# Altium PCB AVRDevBoard.PcbDoc (part 1 of 3)
Units mm, origin at the board's own origin, x right, y up, seen from the top; angles counter-clockwise.
Board outline 84.2 x 55.88 mm, 2 copper layers (Top Layer, Bottom Layer); 37 components, 46 nets, 157 pads, 38 vias.
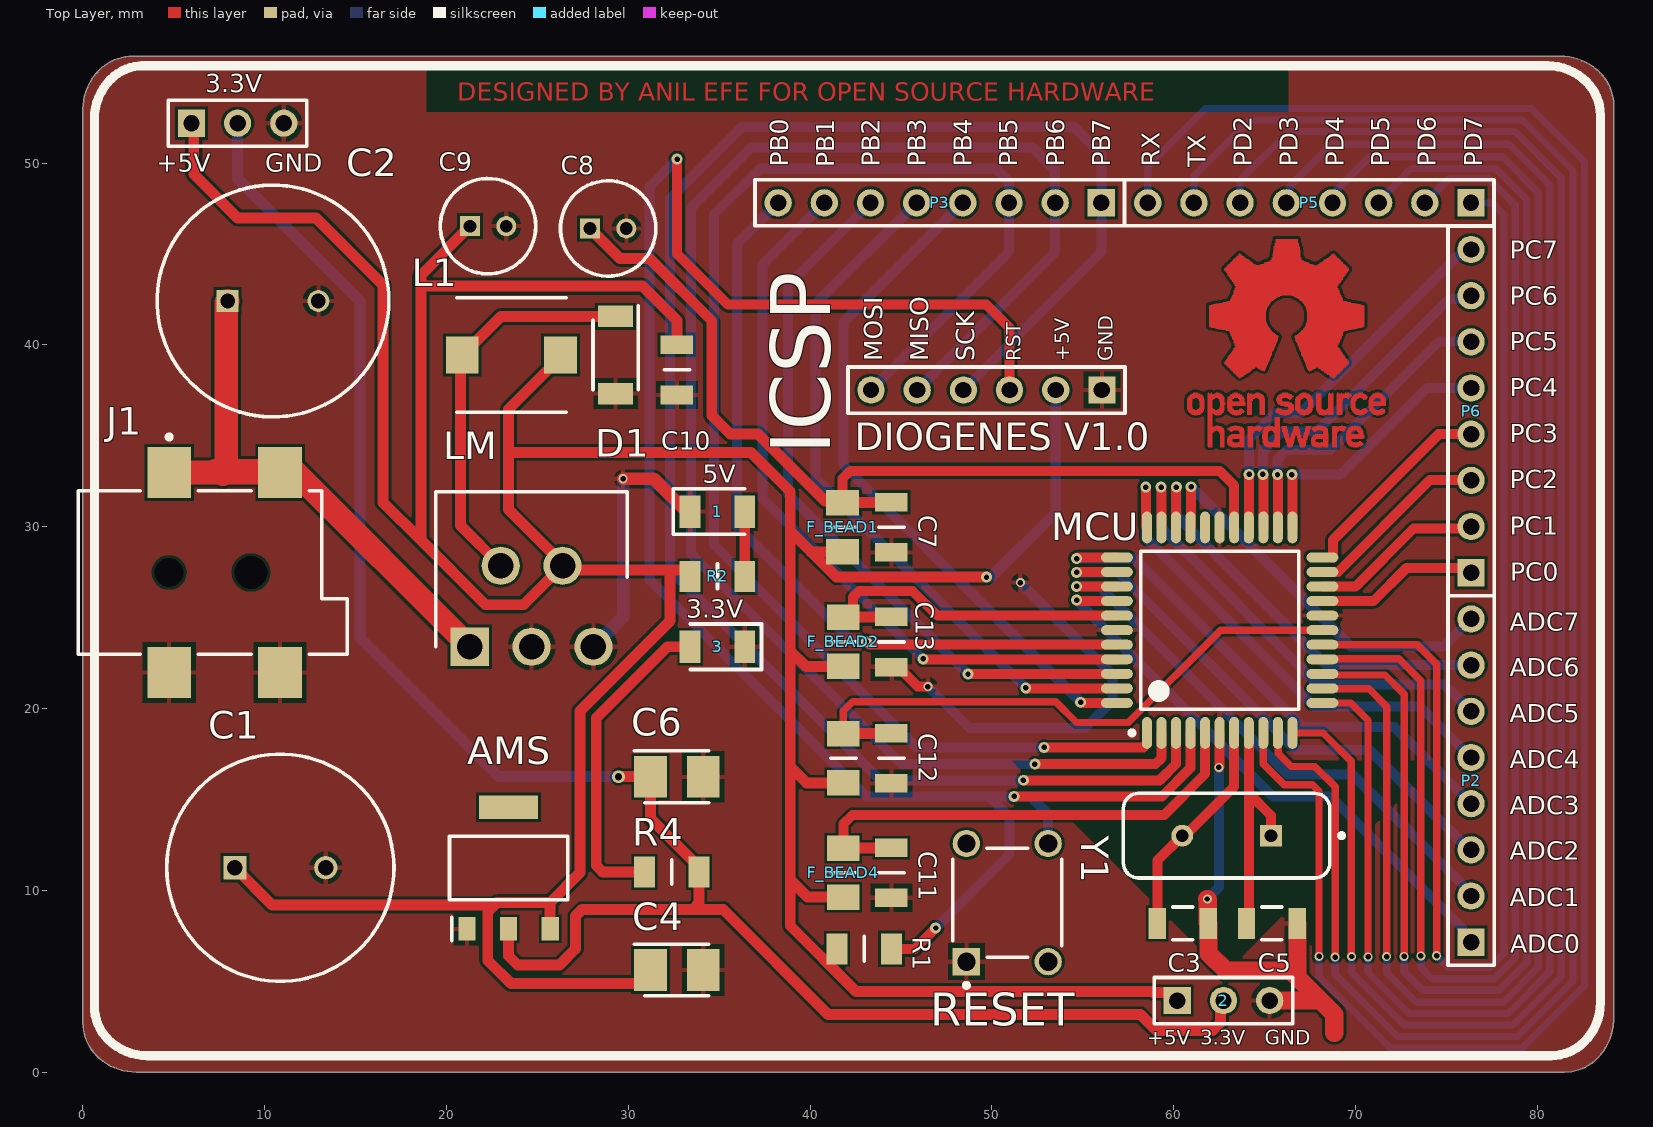
[diagram p0: Top Layer view]
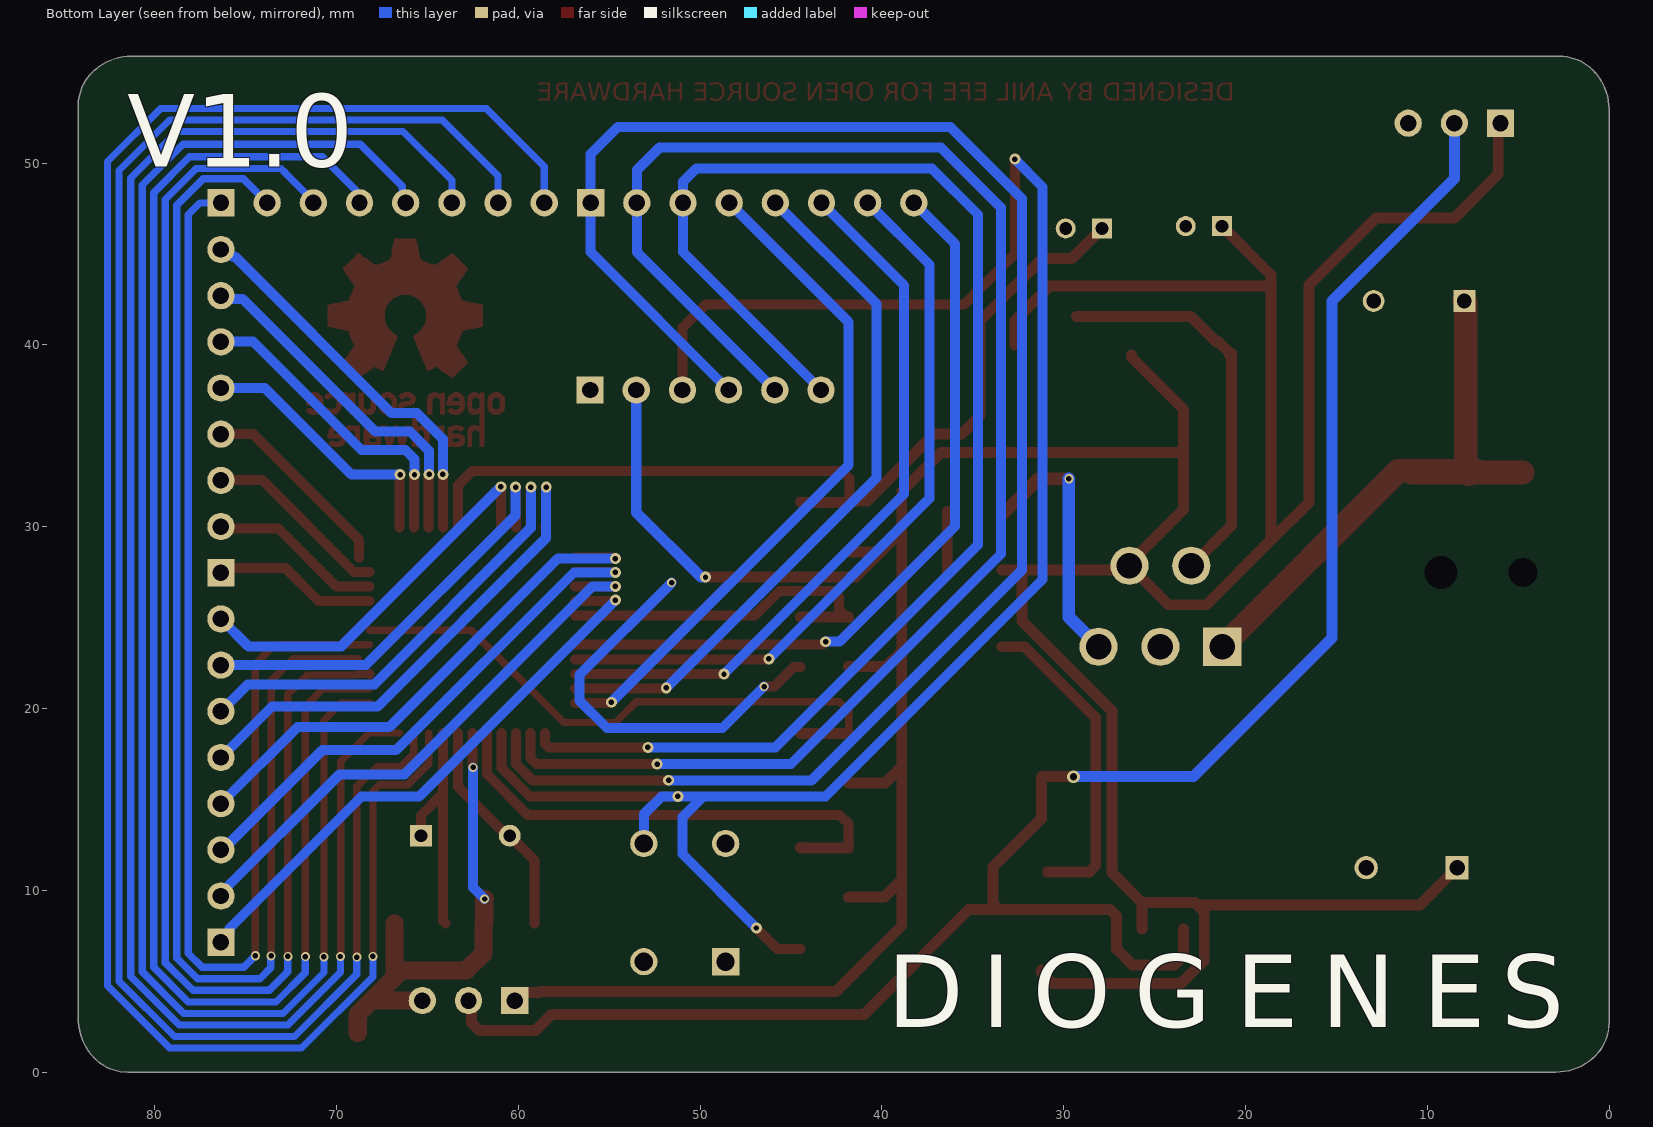
[diagram p1: Bottom Layer view, seen from below]
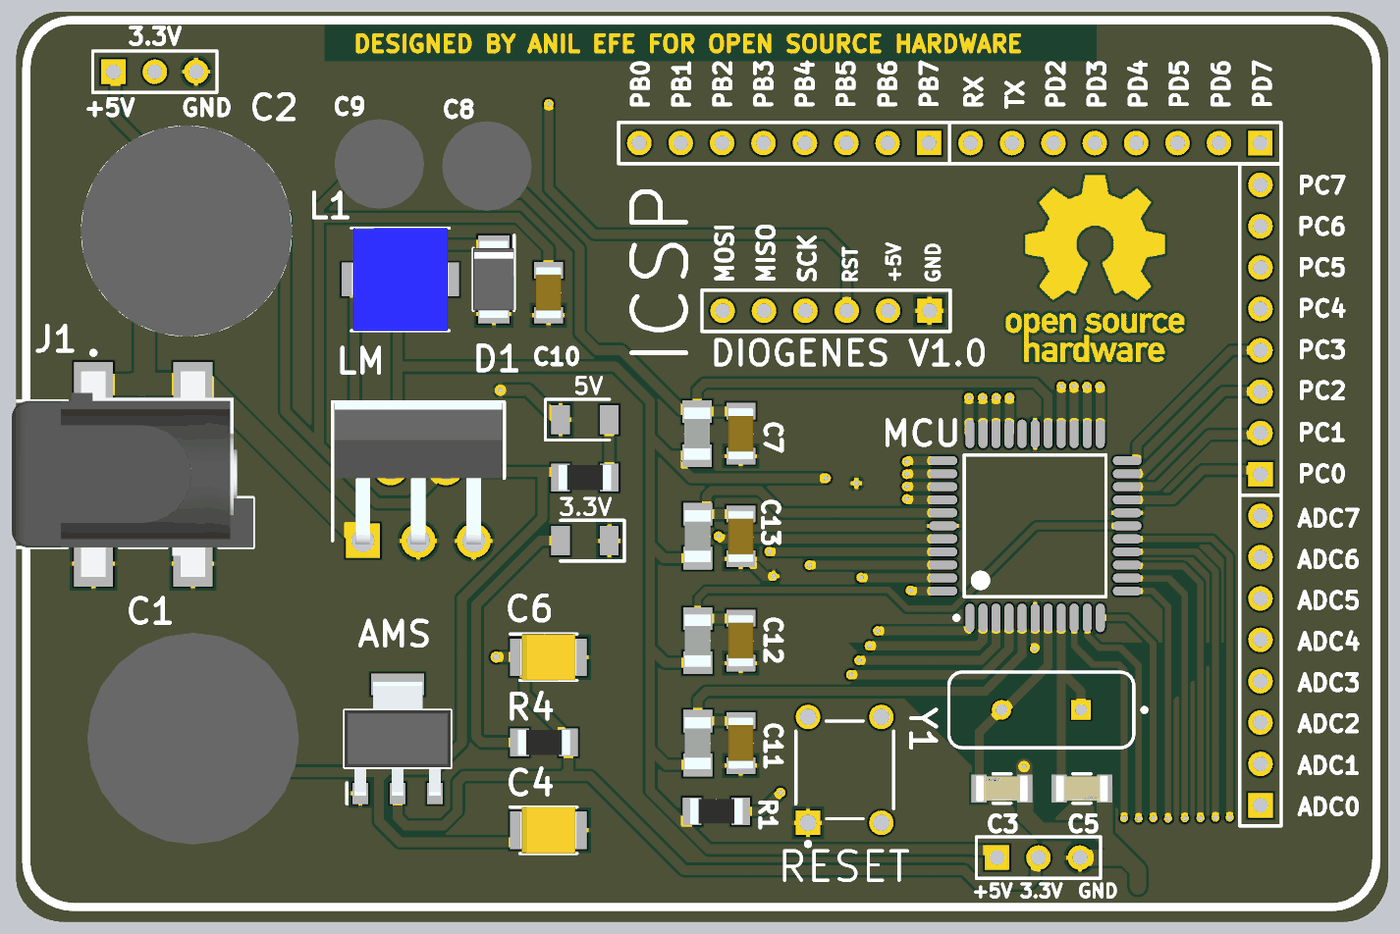
[diagram p4: 3D render of the assembled board from above, using the file's embedded part models]

## Layer stack, top to bottom
Top Solder: solder mask 0.0102, Solder Resist, Dk 3.5
Top Layer: signal copper 0.0356
Dielectric 1: dielectric 0.32, FR-4, Dk 4.8
Bottom Layer: signal copper 0.0356
Bottom Solder: solder mask 0.0102, Solder Resist, Dk 3.5

## Board outline
0,2.716 0,52.959 cw(c3.066,52.959) 0.898,55.127 cw(c2.716,53.309) 2.716,55.88 81.28,55.88 cw(c81.28,52.814) 83.448,54.982 cw(c81.63,53.164) 84.201,53.164 84.201,3.048 84.198,3.048 cw(c81.135,2.921) 83.303,0.753 cw(c81.485,2.571) 81.485,0 2.921,0 cw(c2.921,3.066) 0.753,0.898 cw(c2.571,2.716)

## Design rules (kind name [scope] priority, off if disabled: settings)
Clearance [All] p1: gap=0.15 ignorepadtopadclearanceinfootprint=FALSE
ComponentClearance [All] p1: gap=0 collisioncheckmode=3 verticalgap=0 showdistances=FALSE
PolygonConnect [All] p1: connectstyle=Relief reliefconductorwidth=0.254 reliefentries=4 polygonreliefangle="90 Angle" airgapwidth=0.254
RoutingVias [All] p1: holewidth=0.711 width=1.27 viastyle="Through Hole" minholewidth=0.711 minwidth=1.27 maxholewidth=0.711 maxwidth=1.27
SolderMaskExpansion [All] p1: expansion=0.102 istentingtop=FALSE
Width [All] p1: maxlimit=5 minlimit=0.254 preferedwidth=0.254 minimp=50.000000 maximp=50.000000 favimp=50.000000
29 further rules are at their usual default settings.

## Classes and differential pairs
component class AVRDevBoard: 1 3 3.3V AMS C1 C2 C3 C4 C5 C7 C8 C9 C10 C11 C12 C13 D1 F_BEAD1 F_BEAD2 F_BEAD4 J1 L1 MCU P2 P3 P5 P6 R1 R2 R4 SW? Y1

## Components (designator, comment, footprint, x,y, rotation, side; value= is the part's Value field where it differs from the comment)
1 "LED2_1206" LEDC3216X130N 34.904,30.833 r0 top
2 "Comment" HDR1X3 60.198,3.937 r0 top
3 "LED1_1206" LEDC3216X130N 34.904,23.398 r180 top
AMS "" SOT229P700X180-4N 23.413,11.23 r90 top (schematic designator IC_AMS1)
C1 "220uF" CAPPRD500W65D1250H2200 8.358,11.245 r0 top
C2 "680uF" CAPPRD500W60D1275H2200 7.954,42.418 r0 top
C3 "22pF" FP-C1206C-EB-MFG 60.497,8.182 r0 top value="22 pF"
C4 "C?" CAPPM3528X210N 32.669,5.618 r0 top
C5 "22pF" FP-C1206C-EB-MFG 65.402,8.182 r180 top value="22 pF"
C6 "C?" CAPPM3528X210N 32.669,16.245 r0 top
C7 "100N" CAPC3216X100N 44.468,29.972 r270 top
C8 "10uF" CAPPRD200W50D525H1250 27.89,46.409 r0 top
C9 "10uF" CAPPRD200W50D525H1250 21.286,46.536 r0 top
C10 "100N" CAPC3216X100N 32.669,38.627 r270 top
C11 "100N" CAPC3216X100N 44.468,10.972 r270 top
C12 "100N" CAPC3216X100N 44.468,17.262 r270 top
C13 "100N" CAPC3216X100N 44.468,23.66 r270 top
D1 "" SODFL4725X110N 29.306,39.447 r270 top
F_BEAD1 "" BEADC3216X180N 41.783,29.972 r90 top
F_BEAD2 "" BEADC3216X180N 41.828,23.676 r90 top
F_BEAD3 "" BEADC3216X180N 41.828,17.262 r90 top
F_BEAD4 "" BEADC3216X180N 41.828,10.972 r90 top
J1 "PJ-002AH-SMT-TR" CUI-PJ-002AH-4_V 7.144,27.486 r0 top
L1 "33uH" INDPM6063X300N 23.57,39.447 r180 top
LM "" TO170P470X1028X2142-5P 21.281,23.398 r0 top (schematic designator IC_LM1)
MCU "ATmega32-16AU" 44A_N 62.529,24.311 r90 top (schematic designator U1)
P1 "ICSP" HDR1X6 56.052,37.519 r180 top
P2 "PORTA_ADC" HDR1X8 76.358,7.15 r90 top
P3 "PORTB" HDR1X8 56.021,47.821 r180 top
P5 "PORTD" HDR1X8 76.353,47.818 r180 top
P6 "PORTC" HDR1X8 76.358,27.47 r90 top
R1 "10K" RESC3216X70N 42.971,6.785 r180 top
R2 "220R" RESC3216X70N 34.904,27.273 r0 top (schematic designator 2)
R4 "120R" RESC3216X70N 32.394,11.01 r0 top (schematic designator 4)
Y1 "16MHZ" FOX-FOXSLF160-20 62.91,13.008 r180 top
? "Comment" HDR1X3 5.969,52.197 r0 top
? "Comment" ITT-PTS645S-4_V 50.845,9.325 r90 top

## Footprints (in the part's own frame and the unit in brackets; to place one, negate y for a bottom-side part, rotate by r counter-clockwise, add the part's x,y. Pads: shape width x height; smd on the part's side, far side on the other; paste and mask are expansions set on the pad)
44A_N [mm] "Thin QFP, 44-Leads, Body 10x10mm, Pitch 0.8mm, IPC Medium Density"
  oval 1.75x0.55 smd: 1(-5.65,4) 2(-5.65,3.2) 3(-5.65,2.4) 4(-5.65,1.6) 5(-5.65,0.8) 6(-5.65,0) 7(-5.65,-0.8) 8(-5.65,-1.6) 9(-5.65,-2.4) 10(-5.65,-3.2) 11(-5.65,-4) 23(5.65,-4) 24(5.65,-3.2) 25(5.65,-2.4) 26(5.65,-1.6) 27(5.65,-0.8) 28(5.65,0) 29(5.65,0.8) 30(5.65,1.6) 31(5.65,2.4) 32(5.65,3.2) 33(5.65,4)
  oval 0.55x1.75 smd: 12(-4,-5.65) 13(-3.2,-5.65) 14(-2.4,-5.65) 15(-1.6,-5.65) 16(-0.8,-5.65) 17(0,-5.65) 18(0.8,-5.65) 19(1.6,-5.65) 20(2.4,-5.65) 21(3.2,-5.65) 22(4,-5.65) 34(4,5.65) 35(3.2,5.65) 36(2.4,5.65) 37(1.6,5.65) 38(0.8,5.65) 39(0,5.65) 40(-0.8,5.65) 41(-1.6,5.65) 42(-2.4,5.65) 43(-3.2,5.65) 44(-4,5.65)
  silkscreen extent -5.77,-4.35 4.35,4.95, body extent -5,-5 5,5, height 1.2
BEADC3216X180N [mm]
  rect 1.4x1.8 smd: 1(-1.35,0) 2(1.35,0)
  silkscreen extent 0,-0.7 0,0.7, body extent -1.6,-0.8 1.6,0.8, height 1.8
CAPC3216X100N [mm]
  rect 1.02x1.78 smd: 1(-1.38,0) 2(1.38,0)
  silkscreen extent 0,-0.7 0,0.7, body extent -1.6,-0.8 1.6,0.8, height 1
CAPPM3528X210N [mm]
  rect 1.8x2.3 smd: 1(-1.45,0) 2(1.45,0)
  silkscreen extent -2.35,-1.43 1.75,1.43, body extent -1.75,-1.43 1.75,1.43, height 2.1
CAPPRD200W50D525H1250 [mm]
  rect 1.1x1.1 hole 0.7: 1(0,0)
  round 1.1 hole 0.7: 2(2,0)
  silkscreen extent -1.62,-2.62 3.63,2.62, body extent -1.75,-2.75 3.75,2.75, height 12.5
CAPPRD500W60D1275H2200 [mm]
  rect 1.2x1.2 hole 0.8: 1(0,0)
  round 1.2 hole 0.8: 2(5,0)
  silkscreen extent -3.87,-6.37 8.88,6.37, body extent -4,-6.5 9,6.5, height 22
CAPPRD500W65D1250H2200 [mm]
  rect 1.275x1.275 hole 0.85: 1(0,0)
  round 1.275 hole 0.85: 2(5,0)
  silkscreen extent -3.75,-6.25 8.75,6.25, body extent -4,-6.5 9,6.5, height 22
CUI-PJ-002AH-4_V [mm] "SMD, 4-Leads, Body 14.8x9 mm, Pitch 6.1mm"
  rect 2.4x2.8 smd: 1(-2.4,5.5) 1(3.7,5.5) 2(-2.4,-5.5) 3(3.7,-5.5)
  round 0 hole 1.6: MH1(-2.4,0)
  round 0 hole 1.8: MH2(2.1,0)
  silkscreen extent -7.4,-4.5 7.4,7.57, body extent -7.4,-6.3 7.4,6.3, height 11.2
FOX-FOXSLF160-20 [mm] "THD, 2-Leads, Body 11.35x4.65mm"
  rect 1.2x1.2 hole 0.7: 1(-2.44,0)
  round 1.2 hole 0.7: 2(2.44,0)
  silkscreen extent -6.45,-2.32 5.68,2.32, body extent -5.67,-2.32 5.68,2.33, height 3.6
FP-C1206C-EB-MFG [mm]
  rect 0.95x1.7 smd paste+0 mask+0: 1(-1.4,0) 2(1.4,0)
  silkscreen extent -0.55,-0.9 0.55,0.9, body extent -2,-1 2,1, height 0.25
HDR1X3 [mm] "Connector; Header; 3 Position"
  rect 1.5x1.5 hole 0.9: 1(0,0)
  round 1.5 hole 0.9: 2(2.54,0) 3(5.08,0)
  silkscreen extent -1.27,-1.27 6.35,1.27
HDR1X6 [mm] "Connector; Header; 6 Position"
  rect 1.5x1.5 hole 0.9: 1(0,0)
  round 1.5 hole 0.9: 2(2.54,0) 3(5.08,0) 4(7.62,0) 5(10.16,0) 6(12.7,0)
  silkscreen extent -1.27,-1.27 13.97,1.27
HDR1X8 [mm] "Connector; Header; 8 Position"
  rect 1.5x1.5 hole 0.9: 1(0,0)
  round 1.5 hole 0.9: 2(2.54,0) 3(5.08,0) 4(7.62,0) 5(10.16,0) 6(12.7,0) 7(15.24,0) 8(17.78,0)
  silkscreen extent -1.27,-1.27 19.05,1.27
INDPM6063X300N [mm]
  rect 1.8x2.05 smd: 1(-2.7,0) 2(2.7,0)
  silkscreen extent -3,-3.15 3,3.15, body extent -3,-3.15 3,3.15, height 3
ITT-PTS645S-4_V [mm] "TH, 4-Leads, Body 6x6mm"
  rect 1.5x1.5 hole 1: 1(-3.25,2.25)
  round 1.5 hole 1: 2(3.25,2.25) 3(-3.25,-2.25) 4(3.25,-2.25)
  silkscreen extent -4.67,-3 3,3, body extent -3,-3 3,3, height 4.4
LEDC3216X130N [mm]
  rect 1.15x1.8 smd: 1(-1.5,0) 2(1.5,0)
  silkscreen extent -2.42,-1.25 1.5,1.25
RESC3216X70N [mm]
  rect 1.15x1.7 smd: 1(-1.5,0) 2(1.5,0)
  silkscreen extent 0,-0.67 0,0.67, body extent -1.6,-0.77 1.6,0.77, height 0.7
SODFL4725X110N [mm]
  rect 1.17x1.93 smd: 1(-2.125,0) 2(2.125,0)
  silkscreen extent -2.71,-1.25 1.9,1.25, body extent -2.35,-1.25 2.35,1.25, height 1.1
SOT229P700X180-4N [mm]
  rect 1.3x0.95 smd: 1(-3.35,2.29) 2(-3.35,0) 3(-3.35,-2.29)
  rect 1.3x3.25 smd: 4(3.35,0)
  silkscreen extent -4,-3.25 1.75,3.25, body extent -3.5,-3.25 3.5,3.25, height 1.8
TO170P470X1028X2142-5P [mm]
  rect 2.1x2.1 hole 1.4: 1(0,0)
  round 2.1 hole 1.4: 2(1.7,4.46) 3(3.4,0) 4(5.1,4.46) 5(6.8,0)
  silkscreen extent -1.87,0 8.67,8.53, body extent -1.74,-0.24 8.54,8.53, height 20.67

## Part data
1 3: library part QTLP650C2TR, "LED", Manufacturer_Name=Everlight, Mouser Part Number=638-QTLP650C2, Datasheet Link=https://media.digikey.com/pdf/Data%20Sheets/Everlight%20PDFs/QTLP650(C,D)-2,3,4,7,B.pdf, Height=1.3mm, Manufacturer_Part_Number=QTLP650C2TR, Mouser Price/Stock=https://www.mouser.com/Search/Refine.aspx?Keyword=638-QTLP650C2
AMS: library part ams1117-3.3v, "Integrated Circuit", Manufacturer_Name="Advanced Monolithic Systems", Datasheet Link=http://www.advanced-monolithic.com/pdf/ds1117.pdf, Height=1.8mm, Manufacturer_Part_Number=ams1117-3.3v
C1: library part EEU-FC1J221S, "Capacitor Polarised", Manufacturer_Name=Panasonic, Mouser Part Number=667-EEU-FC1J221S, Datasheet Link=http://uk.rs-online.com/web/p/products/6283835, Height=22mm, Manufacturer_Part_Number=EEU-FC1J221S, Mouser Price/Stock=https://www.mouser.com/Search/Refine.aspx?Keyword=667-EEU-FC1J221S
C2: library part UPW1V681MHD, "Capacitor Polarised", Manufacturer_Name=Nichicon, Mouser Part Number=647-UPW1V681MHD, RS Part Number=7152776P, Allied Price/Stock=https://www.alliedelec.com/nichicon-upw1v681mhd/70187400/, Allied_Number=70187400, Datasheet Link=http://nichicon-us.com/english/products/pdfs/e-upw.pdf, Height=22mm, Manufacturer_Part_Number=UPW1V681MHD, Mouser Price/Stock=https://www.mouser.com/Search/Refine.aspx?Keyword=647-UPW1V681MHD, RS Price/Stock=http://uk.rs-online.com/web/p/products/7152776P
C3 C5: library part CMP-03020-001476-1, "1206 22pF Ceramic Multilayer Capacitor; 50VDC; 125degC; C0G Dielec; +/-5% SMD", Capacitance="22 pF", Manufacturer=KEMET, Manufacturer Part Number=C1206C220J5GACTU, Package=C1206C-EB, Temperature="-55°C to +150°C", Temperature Characteristic=C0G, Temperature Coefficient=15%, Temperature Range High=+150°C, Temperature Range Low=-55°C, Tolerance=0.05, Voltage Rating="50 V", Automotive=Yes, Automotive Grade="Grade 0", Category=Cap, ComponentLink2Description=Datasheet, ComponentLink2URL=https://content.kemet.com/datasheets/KEM_C1007_X8R_ULTRA_150C_SMD.pdf, Device Class L1="Passive Components", Device Class L2=Capacitors, Device Class L3="Ceramic Capacitors", Digikey Description="1206 22pF Ceramic Multilayer Capacitor; 50VDC; 125degC; C0G Dielec; +/-5% SMD", Height=0.88mm, Lead Free=Yes, Material=Ceramic, Mouser Description="1206 22pF Ceramic Multilayer Capacitor; 50VDC; 125degC; C0G Dielec; +/-5% SMD", Octopart=https://octopart.com/c1206c220j5gactu-kemet-131912, RoHS=TRUE, Ipc Land Pattern Name=CAPC320160X78
C4 C6: library part TAJB106M025RNJ, "Capacitor Polarised", Manufacturer_Name=AVX, Mouser Part Number=581-TAJB106M025RNJ, Datasheet Link=http://datasheets.avx.com/TAJ.pdf, Height=2.1mm, Manufacturer_Part_Number=TAJB106M025RNJ, Mouser Price/Stock=https://www.mouser.com/Search/Refine.aspx?Keyword=581-TAJB106M025RNJ
C7 C10 C11 C12 C13: library part CL31B104KBCNNNC, "Capacitor", Manufacturer_Name="Samsung Electro-Mechanics", RS Part Number=7666947, Datasheet Link=http://www.samsungsem.com/kr/support/product-search/mlcc/CL31B104KBCNNNC.jsp, Height=1mm, Manufacturer_Part_Number=CL31B104KBCNNNC, RS Price/Stock=http://uk.rs-online.com/web/p/products/7666947
C8 C9: library part UHE1H100MDD1TD, "Capacitor Polarised", Manufacturer_Name=Nichicon, Mouser Part Number=647-UHE1H100MDD1TD, Datasheet Link=http://nichicon-us.com/english/products/pdfs/e-uhe.pdf, Height=12.5mm, Manufacturer_Part_Number=UHE1H100MDD1TD, Mouser Price/Stock=https://www.mouser.com/Search/Refine.aspx?Keyword=647-UHE1H100MDD1TD
D1: library part VSS8D5M10-M3_H, "Schottky Diode", Manufacturer_Name=Vishay, Manufacturer_Part_Number=VSS8D5M10-M3/H, Mouser Part Number=78-VSS8D5M10-M3/H, Datasheet Link=https://componentsearchengine.com/Datasheets/1/VSS8D5M10-M3_H.pdf, Height=1.1mm, Mouser Price/Stock=https://www.mouser.com/Search/Refine.aspx?Keyword=78-VSS8D5M10-M3%2FH
F_BEAD1 F_BEAD2 F_BEAD3 F_BEAD4: library part BLM31KN601BH1L, "Filter", Manufacturer_Name="Murata Electronics", Mouser Part Number=81-BLM31KN601BH1L, Datasheet Link=https://www.murata.com/en-us/products/productdetail?partno=BLM31KN601BH1%23, Height=1.8mm, Manufacturer_Part_Number=BLM31KN601BH1L, Mouser Price/Stock=https://www.mouser.com/Search/Refine.aspx?Keyword=81-BLM31KN601BH1L
J1: library part CMP-2000-06896-1, "DC Power Jack, Right Angle, -25 to 85 degC, 4-Pin 14.8 x 9 x 11 mm SMD, RoHS, Tape and Reel", Current Rating=5A, Flammability Rating=UL94V-0, Manufacturer=CUIInc., Operating Temperature Range=-25Cto+85C, Package Description="4-Pin Surface Mount Device, Body 14.8 x 9 mm, Pitch 6.1 mm", Package Reference=PJ-002AH, Voltage Rating=24V, Insulation Resistance=100MOhms, Brand=CUI, Connector Type=DCPowerJack, Contact Gender=Male, Contact Material=Brass, Contact Plating=Nickel, Datasheet URL=http://www.cui.com/product/resource/pj-002ah-smt.pdf, Datasheet Version="Rev. 1.03, 11/2012", Factory Pack Quantity=350, Housing Material=Polyamide(PA), Manufacturer URL=http://www.cui.com/, Mounting Angle=Right, Mounting Style=SMD/SMT, Mounting Technology=SurfaceMount, Outside Contact Diameter=6.5mm, Packaging=Reel, PartNumber=PJ-002AH, Product=Jacks, Product Category=DCPowerConnectors, RoHS=True, Termination Style=SMD/SMT, Inside Contact Diameter=2mm
L1: library part B82462G4333M000, "Inductor", Manufacturer_Name=EPCOS, Mouser Part Number=871-B82462G4333M, RS Part Number=4958161P, Datasheet Link=https://en.tdk.eu/inf/30/db/ind_2008/b82462g4.pdf, Height=3mm, Manufacturer_Part_Number=B82462G4333M000, Mouser Price/Stock=https://www.mouser.com/Search/Refine.aspx?Keyword=871-B82462G4333M, RS Price/Stock=http://uk.rs-online.com/web/p/products/4958161P
LM: library part LM2596T-5.0, "Integrated Circuit", Manufacturer_Name="Texas Instruments", Mouser Part Number=926-LM2596T-50, RS Part Number=3313242, Datasheet Link=http://www.ti.com/general/docs/lit/getliterature.tsp?genericPartNumber=lm2596&fileType=pdf, Height=4.7mm, Manufacturer_Part_Number=LM2596T-5.0, Mouser Price/Stock=https://www.mouser.com/Search/Refine.aspx?Keyword=926-LM2596T-50, RS Price/Stock=http://uk.rs-online.com/web/p/products/3313242
MCU: library part CMP-0095-00554-1, "8-bit AVR Microcontroller, 4.5-5.5V, 16MHz, 32KB Flash, 1024 Bytes EEPROM, 2KB SRAM, 44-pin TQFP, Industrial Grade (-40°C to 85°C)", Code_JEDEC=MS-026-ACB, ComponentLink1Description="Manufacturer URL", ComponentLink1URL=http://www.atmel.com/, ComponentLink2Description="ATmega32(L) Datasheet", ComponentLink2URL=http://atmel.com/dyn/resources/prod_documents/doc2503.pdf, ComponentLink3Description="ATmega32(L) Summary", ComponentLink3URL=http://atmel.com/dyn/resources/prod_documents/2503S.pdf, DatasheetVersion="revQ, Feb-2011", PackageDescription="44-Pin Plastic Thin Profile Quad Flat Pack, 10 x 10 x 1.0 mm Body, 0.8 mm Pitch (TQFP)", PackageReference=44A, PackageVersion="revC, Oct-2010"
P1: library part "Header 6", "Header, 6-Pin", LatestRevisionDate=17-Jul-2002, LatestRevisionNote="Re-released for DXP Platform.", Publisher="Altium Limited"
P2 P3 P5 P6: library part "Header 8", "Header, 8-Pin", LatestRevisionDate=17-Jul-2002, LatestRevisionNote="Re-released for DXP Platform.", Publisher="Altium Limited"
R1 R2 R4: library part ERJ-U08F2200V, "Resistor", Manufacturer_Name=Panasonic, Mouser Part Number=667-ERJ-U08F2200V, Datasheet Link=http://uk.rs-online.com/web/p/products/1724351, Height=0.7mm, Manufacturer_Part_Number=ERJ-U08F2200V, Mouser Price/Stock=https://www.mouser.com/Search/Refine.aspx?Keyword=667-ERJ-U08F2200V
Y1: library part CMP-1749-00003-1, "Resistance Weld Thru-Hole Crystal, 16 MHz, -20 to 70 degC, 2-Pin THD, RoHS, Bulk", Case\Package=Axial, Max Operating Temperature="155 degC", Min Operating Temperature="-55 degC", Package Quantity=200, Power Rating="250 mW", Resistance="221 kohm", Tolerance=1%, Voltage Rating="250 V", ComponentLink1Description="Manufacturer URL", ComponentLink1URL=http://www.foxonline.com/, ComponentLink2Description=Datasheet, ComponentLink2URL=http://www.foxonline.com/pdfs/hc49slf.pdf, DatasheetVersion=Mar-15, Length="0.248 inch", Mount="Through Hole", PackageDescription="2-Pin Through Hole Device, Body 11.35 x 4.65 mm", PackageReference=FOXSLF160-20, Packaging=Bulk, RoHSCompliant=true

## Via types
v1: diameter 0.6, hole 0.3, Top Layer to Bottom Layer, 24 vias
v2: diameter 0.5, hole 0.3, Top Layer to Bottom Layer, 13 vias
v3: diameter 0.7, hole 0.4, Top Layer to Bottom Layer, 1 vias

## Nets (pads, with @x,y where several pads share a name; then routed paths per layer and width w, separated by ;. In a path a pad name is that pad's centre, name@x,y a point inside that pad or via, vN(x,y) a via of type N, cw(c..) or ccw(c..) an arc to the next point about the centre after c; other vN are vias at no path point)
+3.3V: 2.2 ?.2@8.509,52.197 AMS.2 C6.1 R4.2 | length 106.2
  Top Layer w0.6: AMS.2@23.413,7.88 23.413,6.404 23.921,5.896 26.207,5.896 27.096,6.785 27.096,8.592 27.447,8.944 33.543,8.944 ; v3(29.464,16.256) 31.208,16.256 C6.1@31.219,16.245 31.219,13.96 33.894,11.285 R4.2@33.894,11.01 33.894,9.295 33.543,8.944 ; 2.2@62.738,3.937 62.566,3.765 62.566,2.719 62.133,2.286 59.055,2.286 58.166,3.175 40.993,3.175 35.224,8.944 33.543,8.944
  Bottom Layer w0.6: ?.2@8.509,52.197 8.509,49.149 15.24,42.418 15.24,23.876 22.86,16.256 v3(29.464,16.256)
+5V: 2.1 ?.1@5.969,52.197 AMS.3 C1.1 C4.1 C9.1 C10.1 F_BEAD1.1 F_BEAD2.1 F_BEAD3.1 F_BEAD4.1 L1.1 LM.4 P1.2 R1.2 R2.1 | length 249.1
  Top Layer w0.6: ?.1@5.969,52.197 6.096,52.07 6.096,49.403 8.509,46.99 12.827,46.99 16.51,43.307 16.51,31.341 18.587,29.264 ; C1.1@8.358,11.245 10.405,9.198 22.651,9.198 ; C9.1@21.286,46.536 18.587,43.837 18.587,43.234 ; AMS.3@25.703,7.88 25.703,9.329 ; L1.1@26.27,39.447 26.27,39.322 23.413,36.465 23.413,34.09 ; C4.1@31.219,5.618 31.219,5.48 30.619,4.88 23.54,4.88 22.27,6.15 22.27,8.817 22.651,9.198 ; C10.1@32.669,40.007 32.669,41.343 30.779,43.234 18.587,43.234 ; R2.1@33.404,27.631 32.303,27.631 ; F_BEAD1.1@41.783,28.622 40.057,28.622 ; F_BEAD4.1@41.828,9.622 41.808,9.642 39.859,9.642 38.907,10.595 ; F_BEAD3.1@41.828,15.912 39.813,15.912 38.907,16.818 ; F_BEAD2.1@41.828,22.31 39.765,22.31 38.907,23.168 ; v1(49.702,27.232) 41.447,27.232 40.057,28.622 ; 2.1@60.198,3.937 59.748,4.387 58.859,4.387 58.801,4.445 42.517,4.445 38.907,8.055 38.907,10.595 ; 18.587,29.264 22.143,25.708 24.231,25.708 LM.4@26.381,27.858 ; 18.587,29.264 18.587,43.234 ; 22.651,9.198 22.782,9.329 25.703,9.329 ; 23.413,34.09 23.413,30.949 26.381,27.981 LM.4@26.381,27.858 ; 23.413,34.09 36.748,34.09 38.907,31.931 38.907,29.772 ; 25.703,9.329 27.35,10.976 27.35,19.866 32.303,24.819 32.303,27.631 ; LM.4@26.381,27.858 26.608,27.631 32.303,27.631 ; 38.907,10.595 38.907,16.818 ; 38.907,16.818 38.907,23.168 ; 38.907,23.168 38.907,29.772 ; 38.907,29.772 40.057,28.622
  Bottom Layer w0.6: v1(49.702,27.232) 49.956,27.232 53.512,30.788 P1.2@53.512,37.519
AVCC: C7.1 C8.1 F_BEAD1.2 MCU.27 | length 51.5
  Top Layer w0.55: F_BEAD1.2@41.783,31.352 41.783,32.648 42.209,33.074 62.529,33.074 63.329,32.274 MCU.27@63.329,29.961
  Top Layer w0.6: C8.1@27.89,46.409 29.541,44.758 31.16,44.758 34.589,41.329 34.589,36.122 35.605,35.106 37.129,35.106 40.812,31.423 41.712,31.423 41.783,31.352 F_BEAD1.2@41.783,31.322 ; F_BEAD1.2@41.798,31.337 44.453,31.337 C7.1@44.468,31.352
DVCC1: C13.1 F_BEAD2.2 MCU.38 | length 19.3
  Top Layer w0.55: F_BEAD2.2@41.828,25.01 41.932,25.01 42.373,25.451 42.373,26.147 42.695,26.47 45.638,26.47 46.997,25.111 MCU.38@56.879,25.111
  Top Layer w0.6: F_BEAD2.2@41.828,25.01 41.843,25.025 44.453,25.025 C13.1@44.468,25.04
DVCC2: C12.1 F_BEAD3.2 MCU.17 | length 33
  Top Layer w0.4: F_BEAD3.2@41.828,18.612 41.828,19.866 42.336,20.374 53.512,20.374 54.655,19.231 57.506,19.231 62.586,24.311 MCU.17@68.179,24.311
  Top Layer w0.6: F_BEAD3.2@41.828,18.612 41.843,18.627 44.453,18.627 C12.1@44.468,18.642
DVCC3: C11.1 F_BEAD4.2 MCU.5 | length 27.3
  Top Layer w0.55: F_BEAD4.2@41.828,12.322 41.828,13.643 42.336,14.151 59.481,14.151 61.729,16.399 MCU.5@61.729,18.661
  Top Layer w0.6: F_BEAD4.2@41.828,12.322 41.843,12.337 44.453,12.337 C11.1@44.468,12.352
GND: 1.1 2.3 3.1 ?.1@48.595,6.075 ?.3@11.049,52.197 AMS.1 C1.2 C2.2 C3.2 C4.2 C5.1 C6.2 C7.2 C8.2 C9.2 C10.2 C11.2 C12.2 C13.2 D1.2 J1.2 J1.3 LM.3 LM.5 MCU.6 MCU.18 MCU.28 MCU.39 P1.1 | length 64.7
  Top Layer w0.55: C13.2@44.468,22.28 44.848,22.28 45.919,21.209 v2(46.482,21.209) ; v2(62.484,16.764) 62.529,16.809 MCU.6@62.529,18.661
  Top Layer w0.7: v2(29.718,32.639) 31.4,32.639 33.305,30.734 1.1@33.404,30.833
  Top Layer w1: v2(61.849,9.525) 61.872,9.502 61.872,8.207 C3.2@61.897,8.182 61.922,8.157 61.922,6.531 62.865,5.588 66.421,5.588 66.802,5.207 ; 2.3@65.278,3.937 68.072,3.937 ; C5.1@66.802,8.182 66.802,5.207 ; 68.834,2.159 68.834,3.175 68.072,3.937 ; 66.802,5.207 68.072,3.937
  Bottom Layer w0.55: v2(46.482,21.209) 48.768,18.923 55.118,18.923 56.642,20.447 56.642,21.844 v2(51.562,26.924) ; v2(61.849,9.525) 62.484,10.16 v2(62.484,16.764)
  Bottom Layer w0.7: LM.5@28.081,23.398 29.718,25.034 v2(29.718,32.639)
Net1_2: 1.2 R2.2 | length 3.4
  Top Layer w0.6: R2.2@36.404,27.405 1.2@36.404,30.833
Net3_2: 3.2 R4.1 | length 17.7
  Top Layer w0.6: R4.1@30.894,11.01 28.59,11.01 28.239,11.361 28.239,19.485 32.152,23.398 3.2@33.404,23.398
NetC3_1: C3.1 MCU.7 Y1.2 | length 12.3
  Top Layer w0.55: C3.1@59.097,8.182 59.097,11.635 Y1.2@60.47,13.008 60.624,13.008 63.329,15.713 MCU.7@63.329,18.661
NetC5_2: C5.2 MCU.8 Y1.1 | length 13.4
  Top Layer w0.55: C5.2@64.002,8.182 64.129,8.309 64.129,15.345 ; MCU.8@64.129,18.661 64.129,15.345 ; Y1.1@65.35,13.008 65.35,14.124 64.129,15.345
NetD1_1: D1.1 L1.2 LM.2 | length 22.1
  Top Layer w0.6: LM.2@22.981,27.858 20.773,30.066 20.773,39.544 L1.2@20.87,39.447 20.87,39.572 21.47,40.172 21.595,40.172 22.995,41.572 D1.1@29.306,41.572
NetP1_4: MCU.3 P1.4 P3.1 | length 97.2
  Top Layer w0.55: v1(51.734,16.056) 59.227,16.056 60.129,16.958 MCU.3@60.129,18.661
  Bottom Layer w0.55: P1.4@48.432,37.519 56.021,45.107 P3.1@56.021,47.821 56.021,50.504 54.528,51.997 36.24,51.997 32.303,48.06 32.303,27.613 43.86,16.056 v1(51.734,16.056)
NetP1_5: MCU.2 P1.5 P3.2 | length 88.5
  Top Layer w0.55: v1(52.369,16.945) 59.007,16.945 59.329,17.267 MCU.2@59.329,18.661 ; P3.2@53.385,47.916 P3.2@53.481,47.821
  Bottom Layer w0.55: P1.5@45.892,37.519 53.481,45.107 P3.2@53.481,47.821 53.481,49.615 52.242,50.854 36.748,50.854 33.446,47.552 33.446,28.502 45.003,16.945 v1(52.369,16.945)
NetP1_6: MCU.1 P1.6 P3.3 | length 79.6
  Top Layer w0.55: P3.3@50.845,47.916 P3.3@50.941,47.821 ; v1(52.877,17.86) 58.329,17.86 58.529,18.061 MCU.1@58.529,18.661
  Bottom Layer w0.55: P1.6@43.352,37.519 50.941,45.107 P3.3@50.941,47.821 50.941,48.98 50.21,49.711 37.256,49.711 34.716,47.171 34.716,29.01 45.865,17.86 v1(52.877,17.86)
NetP2_1: MCU.37 P2.1 | length 31.9
  Top Layer w0.55: v1(54.655,25.962) 54.668,25.962 54.719,25.911 MCU.37@56.879,25.911
  Bottom Layer w0.55: v1(54.655,25.962) 65.45,15.167 68.625,15.167 75.883,7.909 75.883,7.625 P2.1@76.358,7.15
NetP2_2: MCU.36 P2.2 | length 31.1
  Top Layer w0.55: v1(54.655,26.724) 54.668,26.724 54.681,26.711 MCU.36@56.879,26.711
  Bottom Layer w0.55: v1(54.655,26.724) 55.925,26.724 66.266,16.383 69.822,16.383 76.358,9.847 P2.2@76.358,9.69
NetP2_3: MCU.35 P2.3 | length 30.3
  Top Layer w0.55: v1(54.655,27.486) 54.668,27.486 54.693,27.511 MCU.35@56.879,27.511
  Bottom Layer w0.55: v1(54.655,27.486) 56.941,27.486 66.72,17.707 70.784,17.707 76.261,12.23 P2.3@76.358,12.23
NetP2_4: MCU.34 P2.4 | length 29.5
  Top Layer w0.55: v1(54.655,28.248) 54.668,28.248 54.731,28.311 MCU.34@56.879,28.311
  Bottom Layer w0.55: v1(54.655,28.248) 57.83,28.248 67.101,18.977 72.151,18.977 P2.4@76.358,14.77
NetP2_5: MCU.33 P2.5 | length 27.9
  Top Layer w0.55: v1(58.465,32.185) 58.465,30.025 MCU.33@58.529,29.961
  Bottom Layer w0.55: v1(58.465,32.185) 58.465,29.391 67.736,20.12 73.548,20.12 P2.5@76.358,17.31
NetP2_6: MCU.32 P2.6 | length 25.4
  Top Layer w0.55: MCU.32@59.329,29.961 v1@59.329,31.931
  Bottom Layer w0.55: v1(59.311,32.179) 59.311,29.941 67.917,21.336 74.872,21.336 P2.6@76.358,19.85
NetP2_7: MCU.31 P2.7 | length 23.3
  Top Layer w0.55: v1@60.116,32.058 60.129,32.045 MCU.31@60.129,29.961
  Bottom Layer w0.55: v1(60.146,32.179) 60.146,30.631 68.387,22.39 P2.7@76.358,22.39
NetP2_8: MCU.30 P2.8 | length 21.9
  Top Layer w0.55: MCU.30@60.929,29.961 60.955,29.986 60.951,29.99 60.961,30 v1(60.961,32.199)
  Bottom Layer w0.55: v1(60.961,32.199) 69.738,23.422 74.849,23.422 P2.8@76.358,24.93
NetP3_4: MCU.44 P3.4 | length 37.6
  Top Layer w0.55: v1(54.883,20.347) 54.897,20.347 54.933,20.311 MCU.44@56.879,20.311
  Bottom Layer w0.55: P3.4@48.401,47.821 41.828,41.248 41.828,33.402 v1(54.883,20.347)
NetP3_5: MCU.43 P3.5 | length 38.8
  Top Layer w0.55: v1@51.874,21.136 51.899,21.111 MCU.43@56.879,21.111
  Bottom Layer w0.55: P3.5@45.861,47.821 40.304,42.264 40.304,32.693 v1(51.861,21.136)
NetP3_6: MCU.42 P3.6 | length 40.1
  Top Layer w0.55: v1@48.686,21.911 MCU.42@56.879,21.911
  Bottom Layer w0.55: P3.6@43.321,47.821 38.78,43.28 38.78,31.804 v1(48.686,21.898)
NetP3_7: MCU.41 P3.7 | length 40.8
  Top Layer w0.55: v1(46.216,22.73) 46.235,22.711 MCU.41@56.879,22.711
  Bottom Layer w0.55: P3.7@40.781,47.821 37.383,44.423 37.383,31.563 v1(46.216,22.73)
NetP3_8: MCU.40 P3.8 | length 42.3
  Top Layer w0.55: v1(43.098,23.676) 43.111,23.676 43.276,23.511 MCU.40@56.879,23.511
  Bottom Layer w0.55: P3.8@38.241,47.821 35.986,45.566 35.986,30.026 42.336,23.676 v1(43.098,23.676)
NetP4_1: MCU.19 P6.1 | length 9
  Top Layer w0.55: MCU.19@68.179,25.911 70.987,25.911 72.816,27.74 76.088,27.74 P6.1@76.358,27.47
NetP4_2: MCU.20 P6.2 | length 9.5
  Top Layer w0.55: MCU.20@68.179,26.711 70.009,26.711 73.197,29.899 76.246,29.899 P6.2@76.358,30.01
NetP5_1: MCU.16 P5.1 | length 69.7
  Top Layer w0.4: MCU.16@68.179,23.511 73.39,23.511 74.467,22.434 v2(74.467,6.404)
  Bottom Layer w0.4: v2(74.467,6.404) 75.102,5.769 77.388,5.769 78.15,6.531 78.15,47.171 77.515,47.806 76.365,47.806 P5.1@76.353,47.818
NetP5_2: MCU.15 P5.2 | length 74.5
  Top Layer w0.4: MCU.15@68.804,22.733 72.39,22.733 73.593,21.53 v2(73.593,6.39)
  Bottom Layer w0.4: v2(73.593,6.39) 73.612,6.371 73.612,5.735 74.213,5.134 77.642,5.134 78.785,6.277 78.785,47.679 77.324,49.139 75.134,49.139 P5.2@73.813,47.818
NetP5_3: MCU.14 P5.3 | length 79.7
  Top Layer w0.4: MCU.14@68.179,21.911 68.208,21.882 68.914,21.882 68.952,21.844 71.628,21.844 72.679,20.793 v2(72.679,6.366)
  Top Layer w0.55: MCU.14@68.179,21.911 MCU.14@68.192,21.898
  Bottom Layer w0.4: P5.3@71.273,47.818 71.273,47.913 72.816,49.457 72.816,49.476 73.05,49.711 77.716,49.711 79.42,48.006 79.42,6.023 77.896,4.499 73.705,4.499 72.688,5.516 72.688,6.357 v2(72.679,6.366)
NetP5_4: MCU.13 P5.4 | length 84.5
  Top Layer w0.4: MCU.13@68.179,21.111 68.208,21.082 70.739,21.082 71.714,20.107 v2(71.714,6.354)
  Bottom Layer w0.4: P5.4@68.733,47.818 68.943,48.028 68.943,48.505 70.784,50.346 78.084,50.346 80.055,48.375 80.055,5.769 78.15,3.864 73.324,3.864 71.714,5.474 v2(71.714,6.354)
NetP5_5: MCU.12 P5.5 | length 89.1
  Top Layer w0.4: MCU.12@68.179,20.311 69.732,20.311 70.69,19.353 v2(70.69,6.337)
  Bottom Layer w0.4: P5.5@66.193,47.818 66.382,48.007 66.382,48.738 68.687,51.042 78.446,51.042 80.69,48.798 80.69,5.515 78.404,3.229 72.943,3.229 70.69,5.481 v2(70.69,6.337)
NetP5_6: MCU.11 P5.6 | length 94.3
  Top Layer w0.4: MCU.11@66.529,18.661 68.207,18.661 69.768,17.1 v2@69.768,6.361
  Bottom Layer w0.4: P5.6@63.653,47.818 63.653,49.056 66.339,51.743 78.771,51.743 81.325,49.189 81.325,5.261 78.658,2.594 72.689,2.594 69.783,5.499 v2(69.783,6.361)
NetP5_7: MCU.10 P5.7 | length 100.4
  Top Layer w0.4: MCU.10@65.754,18.636 65.754,17.53 66.466,16.818 67.764,16.818 68.881,15.701 v2(68.881,6.332)
  Bottom Layer w0.4: P5.7@61.113,47.818 61.113,49.31 64.18,52.378 79.183,52.378 81.96,49.601 81.96,5.007 78.912,1.959 72.308,1.959 68.881,5.386 v2(68.881,6.332)
NetP5_8: MCU.9 P5.8 | length 107.2
  Top Layer w0.4: MCU.9@64.929,18.661 64.929,16.958 66.085,15.802 67.638,15.802 67.99,15.45 v2@67.99,6.307
  Bottom Layer w0.4: P5.8@58.573,47.818 58.573,49.818 61.767,53.013 79.674,53.013 82.595,50.092 82.595,4.753 79.166,1.324 71.927,1.324 67.996,5.254 v2(67.996,6.364)
NetP6_3: MCU.21 P6.3 | length 10.3
  Top Layer w0.55: MCU.21@68.179,27.511 69.031,27.511 74.086,32.566 76.342,32.566 P6.3@76.358,32.55
NetP6_4: MCU.22 P6.4 | length 11
  Top Layer w0.55: MCU.22@68.771,28.311 68.771,29.282 74.578,35.09 P6.4@76.358,35.09
NetP6_5: MCU.23 P6.5 | length 14.8
  Top Layer w0.55: v1(66.503,32.87) 66.529,32.845 MCU.23@66.529,29.961
  Bottom Layer w0.55: v1(66.503,32.87) 69.184,32.87 73.959,37.646 76.342,37.646 P6.5@76.358,37.63
NetP6_6: MCU.24 P6.6 | length 17.3
  Top Layer w0.55: v1(65.709,32.867) 65.729,32.848 MCU.24@65.729,29.961 ; P6.6@76.246,40.059 P6.6@76.358,40.17
  Bottom Layer w0.55: v1(65.709,32.867) 65.719,32.877 65.719,33.724 66.212,34.217 68.625,34.217 74.594,40.186 76.342,40.186 P6.6@76.358,40.17
NetP6_7: MCU.25 P6.7 | length 19.2
  Top Layer w0.55: v1(64.908,32.878) 64.908,32.865 64.929,32.843 MCU.25@64.929,29.961
  Bottom Layer w0.55: v1(64.908,32.878) 64.908,34.182 65.958,35.233 67.863,35.233 75.159,42.528 76.176,42.528 P6.7@76.358,42.71
NetP6_8: MCU.26 P6.8 | length 21.4
  Top Layer w0.55: MCU.26@64.129,29.961 64.129,32.848 64.146,32.865 v1(64.146,32.878)
  Bottom Layer w0.55: v1(64.146,32.878) 64.146,34.817 65.577,36.249 66.974,36.249 75.603,44.878 75.728,44.878 76.101,45.25 P6.8@76.358,45.25
RST: ?.4 MCU.4 P1.3 R1.1 | length 105.8
  Top Layer w0.55: v1(32.684,50.219) 32.684,45.012 35.478,42.218 49.702,42.218 50.972,40.948 P1.3@50.972,37.519 ; R1.1@44.471,6.785 45.765,6.785 v1(46.908,7.928) ; v1(51.226,15.167) 59.354,15.167 60.929,16.742 MCU.4@60.929,18.661
  Bottom Layer w0.55: v1(32.684,50.219) 31.16,48.695 31.16,27.105 43.098,15.167 49.829,15.167 ; v1(46.908,7.928) 50.972,11.992 50.972,14.024 49.829,15.167 ; ?.4@53.095,12.575 53.095,14.187 52.115,15.167 v1(51.226,15.167) 49.829,15.167
VIN: C2.1 J1.1 LM.1 | length 33.7
  Top Layer w1.3: J1.1@4.744,32.986 7.789,32.986 ; 7.284,33.074 7.877,33.074 10.844,33.074 11.605,33.074 LM.1@21.281,23.398 ; 7.708,32.905 7.789,32.986 ; C2.1@7.954,42.418 7.874,42.338 7.874,33.071 7.789,32.986 ; J1.1@10.844,32.986 7.789,32.986
pads on no net: ?.2@48.595,12.575 ?.3@53.095,6.075 AMS.4 J1.MH1 J1.MH2 MCU.29
copper on no net: | length 1893